# Altium PCB HMC830_Module.PcbDoc
Units mil, origin at the board's own origin, x right, y up, seen from the top; angles counter-clockwise.
Board outline 1670 x 1130 mil, 4 copper layers (Top Layer, GND, PWR, Bottom Layer), stack 23.756 mil thick; 60 components, 30 nets, 196 pads, 220 vias.
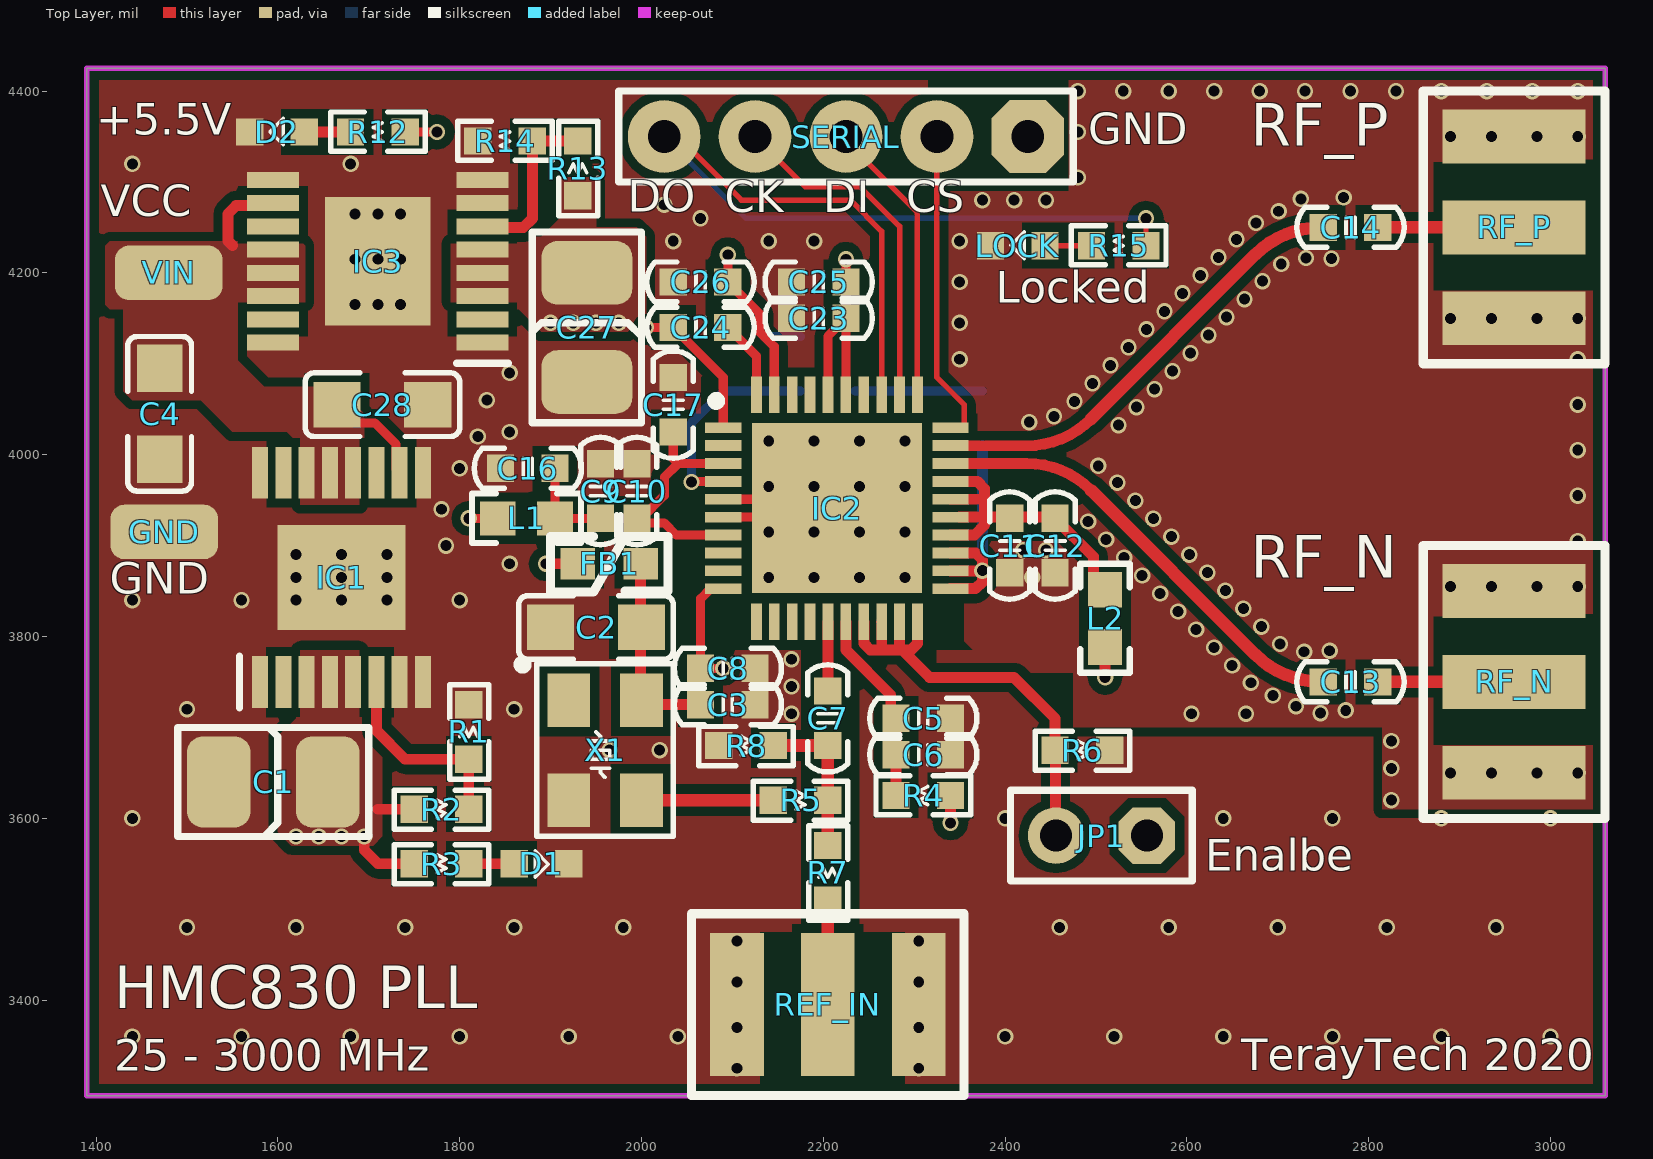
[diagram p0: Top Layer view]
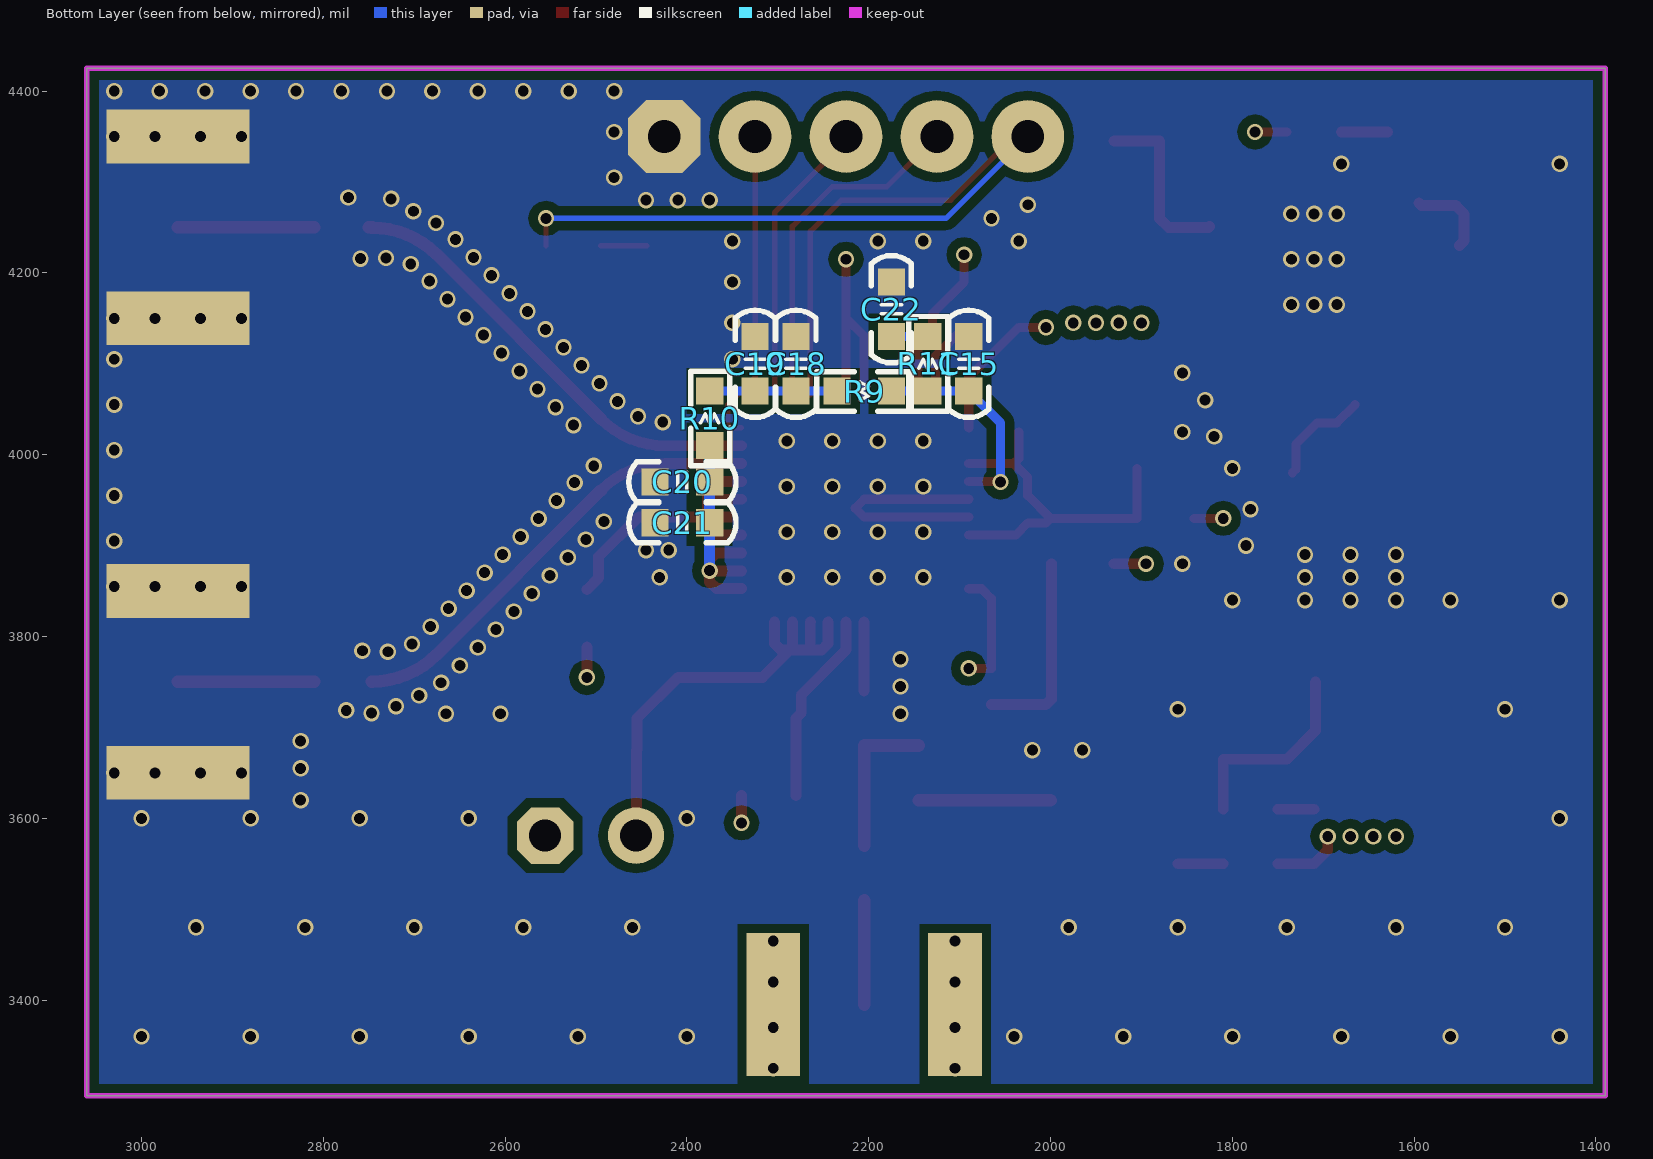
[diagram p1: Bottom Layer view, seen from below]
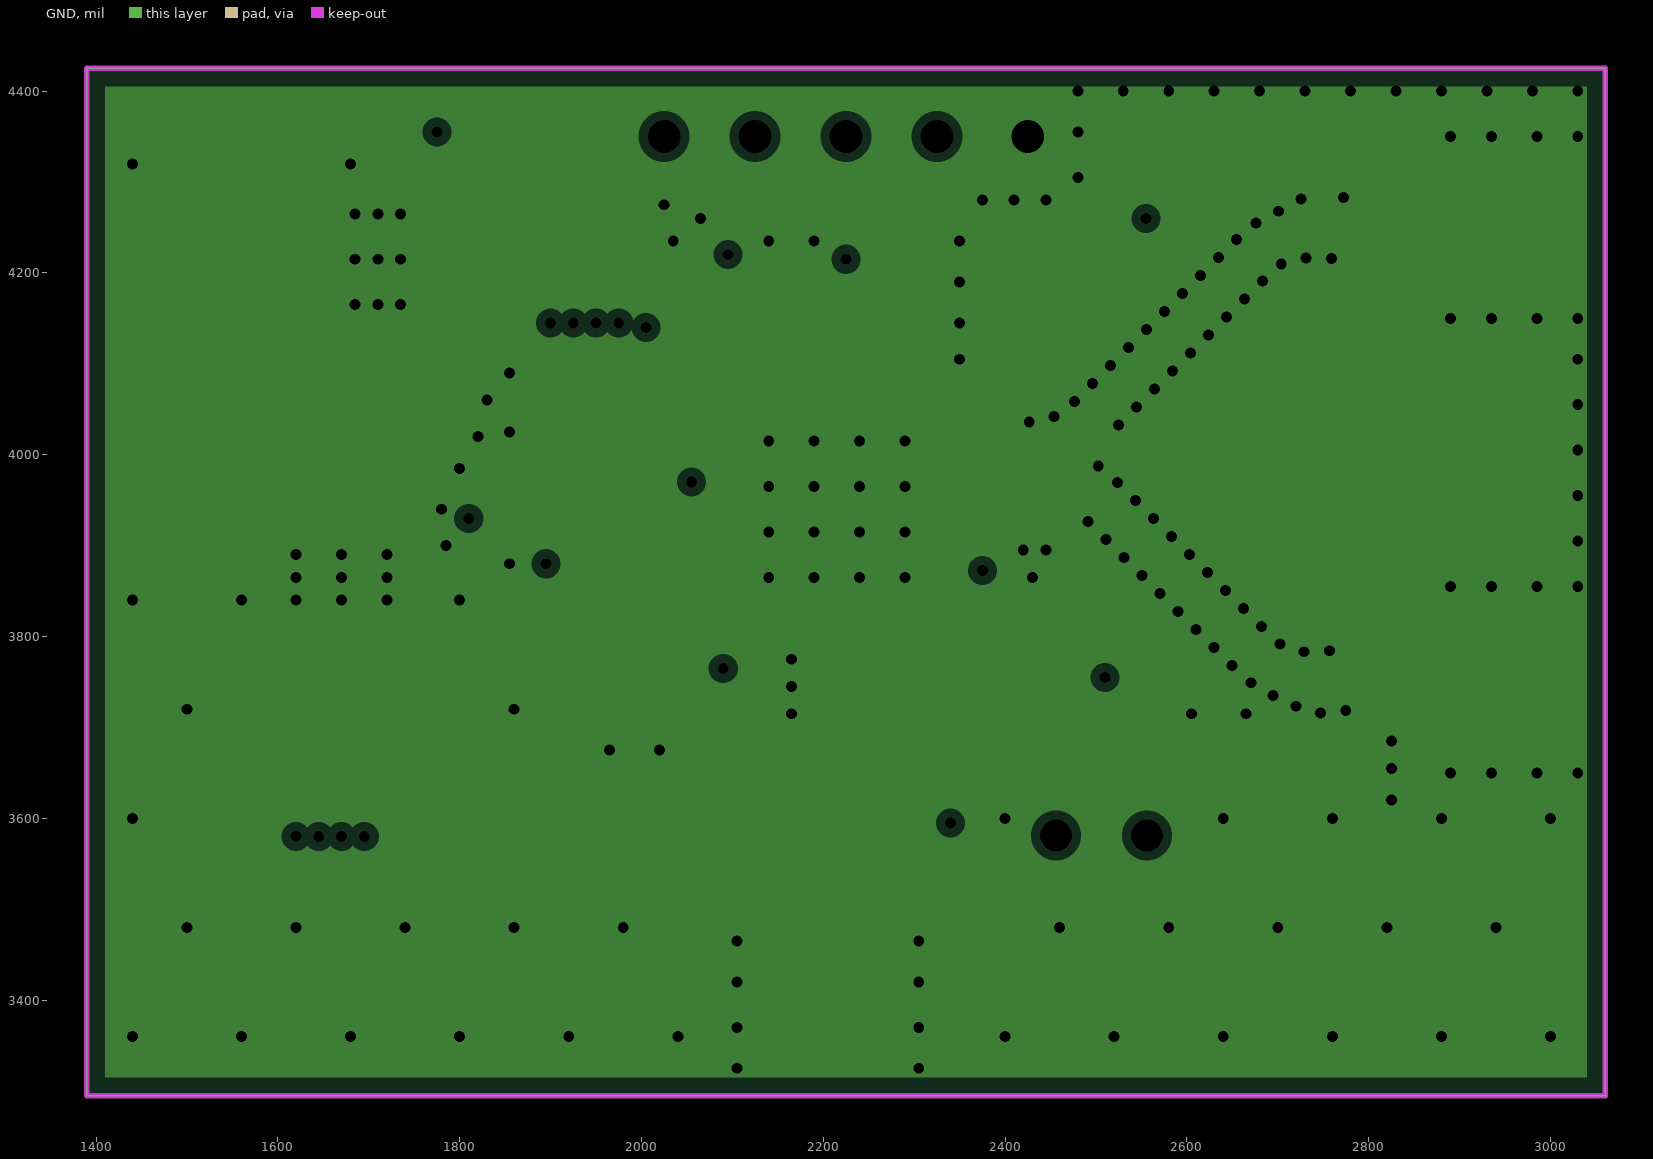
[diagram p2: GND, clearances drawn from the general rule]
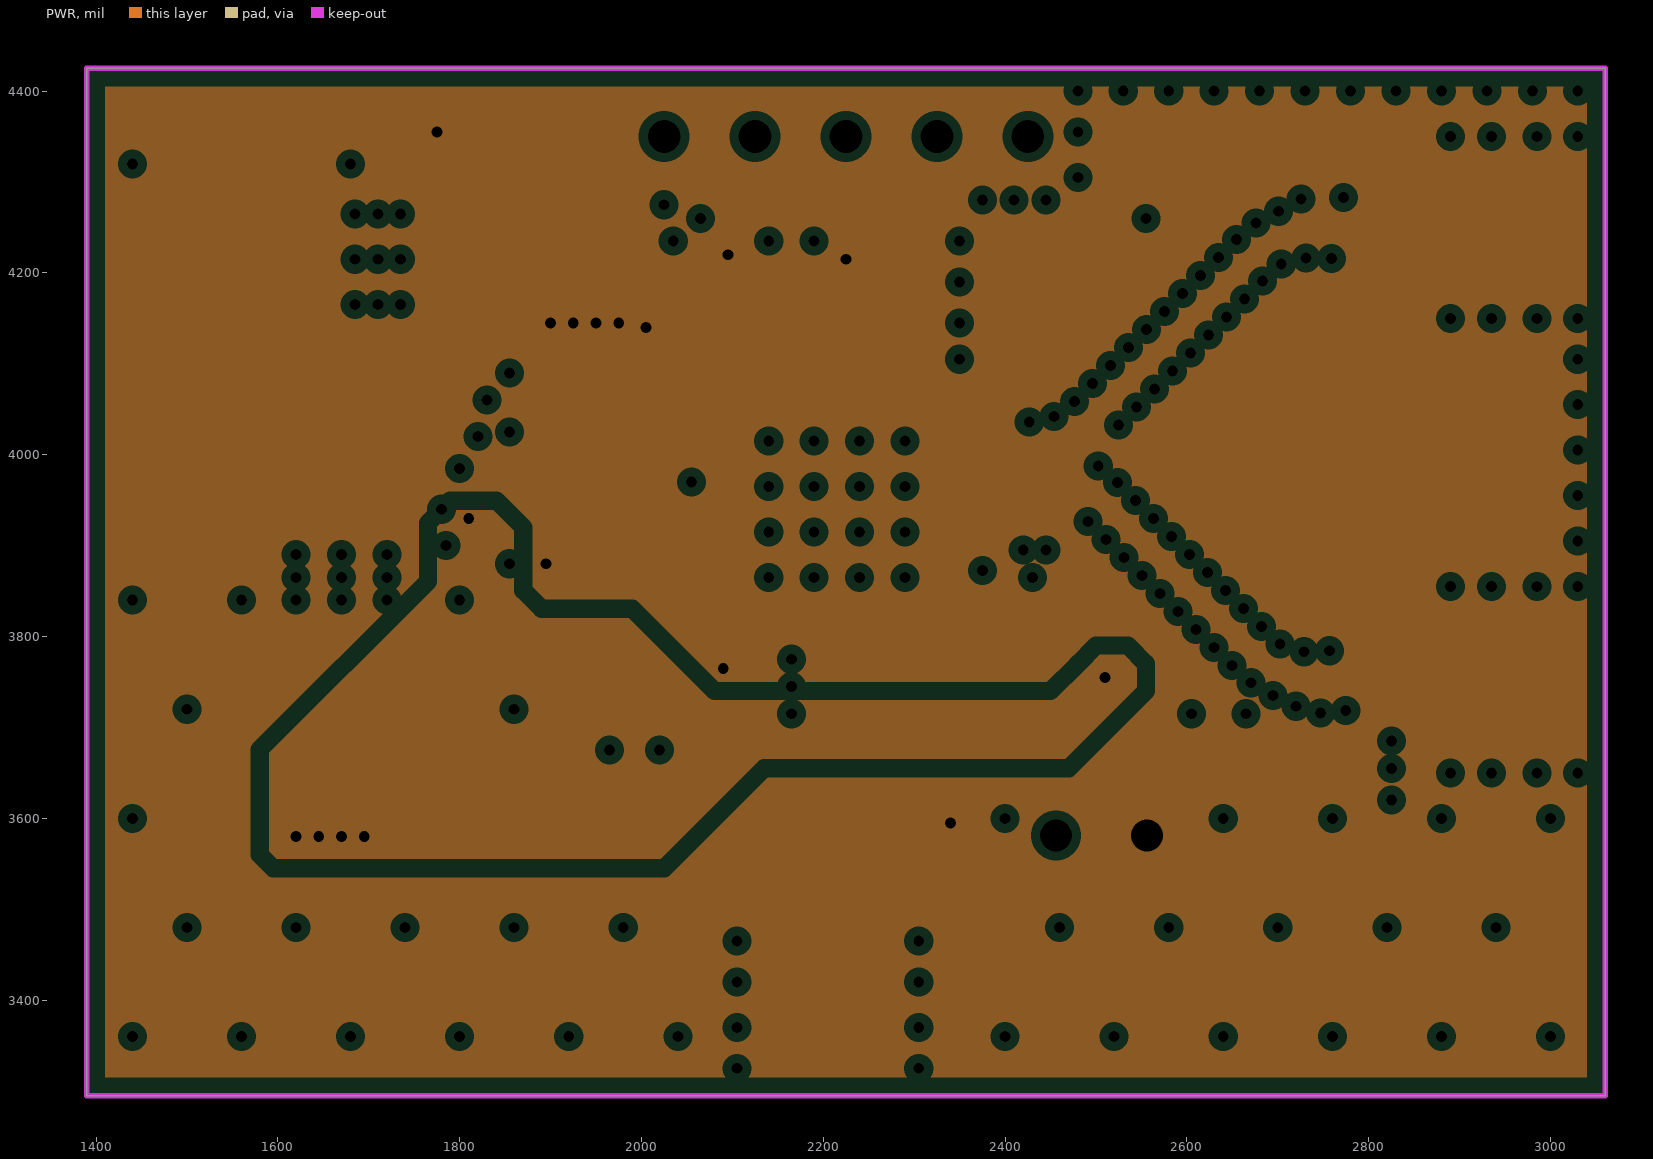
[diagram p3: PWR, clearances drawn from the general rule]
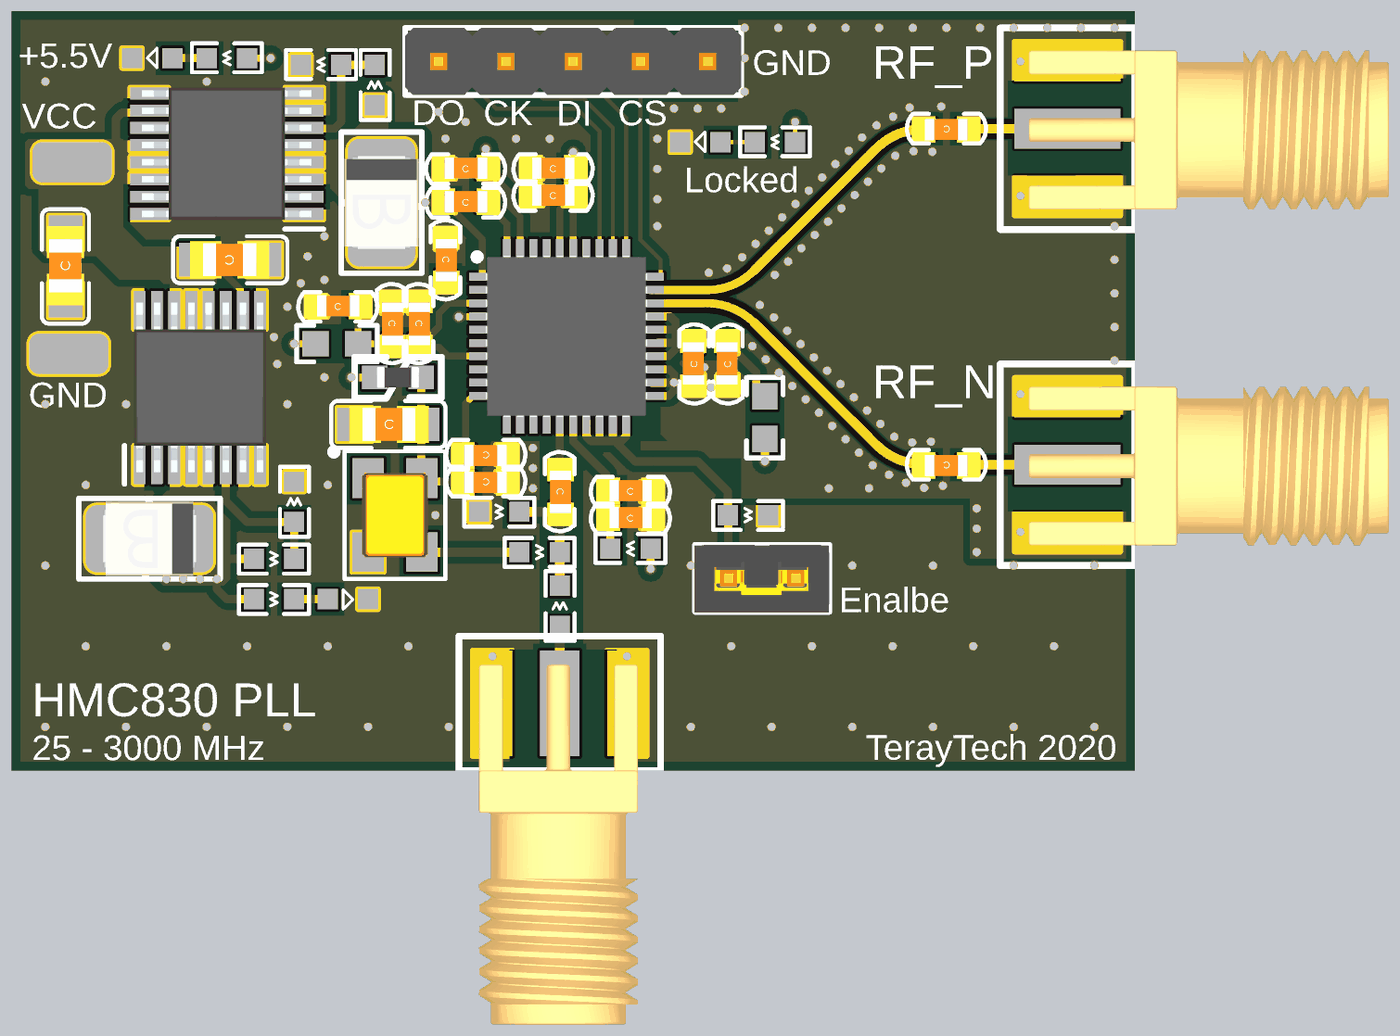
[diagram p4: 3D render of the assembled board from above, using the file's embedded part models]
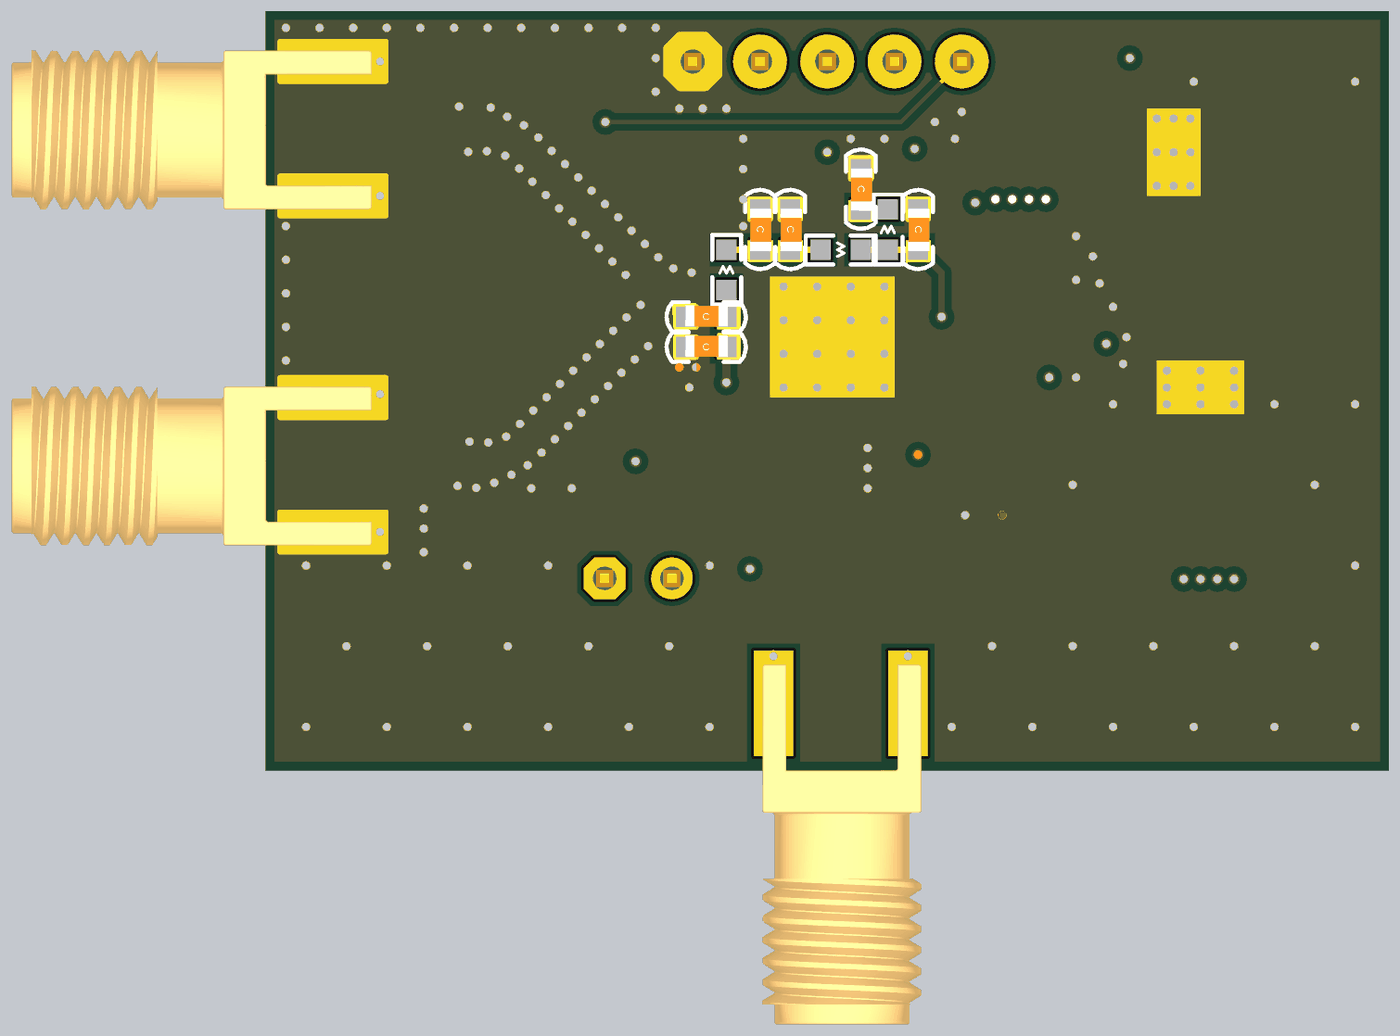
[diagram p5: 3D render of the assembled board from below, using the file's embedded part models]

## Layer stack, top to bottom
Top Solder: solder mask 0.4, Solder Resist, Dk 3.5
Top Layer: signal copper 1.4
Dielectric 2: prepreg 2.8, PP-006, Dk 4.1
GND: plane copper 1.378, net GND
Dielectric 1: dielectric 12.6, FR-4, Dk 4.8
PWR: plane copper 1.378, net (Multiple Nets)
Dielectric 3: prepreg 2.8, PP-006, Dk 4.1
Bottom Layer: signal copper 1.4
Bottom Solder: solder mask 0.4, Solder Resist, Dk 3.5

## Board outline
1390,3295 1390,4425 3060,4425 3060,3295

## Design rules (kind name [scope] priority, off if disabled: settings)
Clearance RF [(InNet('RF_N') AND InNet('RF_P'))] p1: gap=20 ignorepadtopadclearanceinfootprint=TRUE except(0: Arc-Text Arc-Hole Track-Text Track-Hole SMDPad-Text SMDPad-Hole THPad-Text THPad-Hole Via-Text Via-Hole Fill-Text Fill-Hole Poly-Text Poly-Hole Region-Text Region-Hole Text-Text Text-Hole; 6: Arc-Arc Arc-Track Arc-SMDPad Arc-THPad Arc-Via Track-Track Track-SMDPad Track-THPad Track-Via SMDPad-SMDPad SMDPad-THPad SMDPad-Via THPad-THPad THPad-Via Via-Via)
Clearance [All] p2: gap=10 ignorepadtopadclearanceinfootprint=TRUE except(0: Arc-Text Arc-Hole Track-Text Track-Hole SMDPad-Text SMDPad-Hole THPad-Text THPad-Hole Via-Text Via-Hole Fill-Text Fill-Hole Poly-Text Poly-Hole Region-Text Region-Hole Text-Text Text-Hole; 6: Arc-Arc Arc-Track Arc-SMDPad Arc-THPad Arc-Via Track-Track Track-SMDPad Track-THPad Track-Via SMDPad-SMDPad SMDPad-THPad SMDPad-Via THPad-THPad THPad-Via Via-Via)
ComponentClearance [All] p1 off: gap=10 collisioncheckmode=3 verticalgap=10 showdistances=FALSE
PlaneClearance [All] p1: clearance=10
PlaneConnect [All] p1: planeconnectstyle=Direct reliefexpansion=20 reliefentries=4 reliefconductorwidth=10 reliefairgap=10
PolygonConnect [All] p1: connectstyle=Direct reliefconductorwidth=10 reliefentries=4 polygonreliefangle="90 Angle" airgapwidth=10
RoutingVias [All] p1: holewidth=12 width=18 viastyle="Through Hole" minholewidth=12 minwidth=18 maxholewidth=28 maxwidth=50
SolderMaskExpansion [All] p1: expansion=4
Width [All] p1: maxlimit=20 minlimit=6 preferedwidth=10 minimp=50.000000 maximp=50.000000 favimp=50.000000
27 further rules are at their usual default settings.

## Components (designator, comment, footprint, x,y, rotation, side; value= is the part's Value field where it differs from the comment)
C1 "1uF" CAPC3528B 1605,3630 r180 top value=104
C2 "10uF, 0805" 0805_c 1905,3810 r0 top value=104
C3 "0.1uF" 0603_C 2095,3725 r180 top value=104
C4 "10uF" 0805_c 1470,4000 r90 top value=104
C5 "4.7uF" 0603_C 2310,3710 r0 top value=104
C6 "0.47uF" 0603_C 2310,3670 r0 top value=104
C7 "0.1uF" 0603_C 2205,3710 r270 top value=104
C8 "0.47uF" 0603_C 2095,3765 r180 top value=104
C9 "22pF" 0603_C 1955,3960 r270 top value=104
C10 "0.47uF" 0603_C 1995,3960 r270 top value=104
C11 "0.47uF" 0603_C 2405,3900 r90 top value=104
C12 "22pF" 0603_C 2455,3900 r90 top value=104
C13 "100pF" 0603_C 2780,3750 r180 top value=104
C14 "100pF" 0603_C 2780,4250 r180 top value=104
C15 "150pF" 0603_C 2090,4100 r270 bottom value=104
C16 "4.7uF" 0603_C 1875,3985 r0 top value=104
C17 "0.47uF" 0603_C 2035,4055 r270 top value=104
C18 "DNP" 0603_C 2280,4100 r270 bottom value=104
C19 "220pF" 0603_C 2325,4100 r270 bottom value=104
C20 "DNP" 0603_C 2405,3970 r180 bottom value=104
C21 "220pF" 0603_C 2405,3925 r180 bottom value=104
C22 "0.027uF" 0603_C 2175,4160 r270 bottom value=104
C23 "22pF" 0603_C 2195,4150 r0 top value=104
C24 "0.001uF" 0603_C 2065,4140 r0 top value=104
C25 "4.7uF" 0603_C 2195,4190 r0 top value=104
C26 "0.47uF" 0603_C 2065,4190 r0 top value=104
C27 "1uF" CAPC3528B 1950,4150 r270 top value=104
C28 "10uF" 0805_c 1760,4055 r180 top value=104
D1 "LED" 0603_LED 1889,3550 r0 top
D2 "LED" 0603_LED 1600,4355 r180 top
FB1 "100MHz" FB0603 1964.5,3880 r0 top
GND "PAD" PAD 1475,3915 r180 top
IC1 "LT1963AEFE#PBF" SOP65P640X110-17N 1670,3865 r90 top
IC2 "HMC830LP6GE" QFN50P600X600X90-41N-D 2215,3941.1 r0 top
IC3 "LT1963AEFE#PBF" SOP65P640X110-17N 1709.84,4212.8 r180 top
JP1 "header" jumper 2556,3581 r180 top
L1 "47nH" 0603 1873.5,3930 r0 top
L2 "47nH" 0603 2510,3820 r90 top
LOCK "LED" 0603_LED 2415,4230 r180 top
R1 "1K" 0603_R 1810,3695 r270 top
R2 "1K" 0603_R 1780,3610 r180 top
R3 "1K" 0603_R 1780,3550 r180 top
R4 "51" 0603_R 2310,3625 r0 top value=1K
R5 "OR" 0603_R 2175,3620 r180 top value=1K
R6 "10K" 0603_R 2485,3675 r180 top value=1K
R7 "OR" 0603_R 2205,3540 r270 top value=1K
R8 "100" 0603_R 2115,3680 r180 top value=1K
R9 "1K" 0603_R 2205,4070 r0 bottom
R10 "1K" 0603_R 2375,4040 r270 bottom
R11 "820" 0603_R 2135,4100 r270 bottom value=1K
R12 "1K" 0603_R 1710,4355 r0 top
R13 "1K" 0603_R 1930,4315 r270 top
R14 "1K" 0603_R 1850,4345 r0 top
R15 "1K" 0603_R 2525,4230 r0 top
REF_IN "SMA-KHD" SMA-2 2205,3395 r0 top
RF_N "SMA-KHD" SMA-2 2960,3750 r90 top locked
RF_P "SMA-KHD" SMA-2 2960,4250 r90 top
SERIAL "header" header5 2425,4350 r180 top
VIN "PAD" PAD 1480,4200 r180 top
X1 "XTAL TCXO" OSC_KH3225_4P 2005,3610 r270 top

## Footprints (in the part's own frame and the unit in brackets; to place one, negate y for a bottom-side part, rotate by r counter-clockwise, add the part's x,y. Pads: shape width x height; smd on the part's side, far side on the other; paste and mask are expansions set on the pad)
0603 [mm] "0603 from SM-752 data"
  rect 1x0.95 smd: 1(-0.8,0) 2(0.8,0)
  silkscreen extent -1.52,-0.69 1.52,0.69, body extent -0.87,-0.47 0.87,0.47, height 1
0603_C [mil] "Capacitor"
  rect 30x30 smd: 1(-30,0) 2(30,0)
  silkscreen extent -59,-22 59,22, body extent -51,-18 52,21, height 35
0603_LED [mil]
  rect 30x30 smd: 1(-29,0) 2(31,0)
  silkscreen extent -6,-15 9,14, body extent -31,-16 31,16, height 24
0603_R [mil]
  rect 30x30 smd: 1(-30,0) 2(30,0)
  silkscreen extent -52,-21 52,22, body extent -34,-19 34,19, height 39
0805_c [mil]
  rect 52x50 smd: 1(-5,0) 2(95,0)
  silkscreen extent -40,-35 130,35, body extent -13,-28 105,28, height 37
CAPC3528B [mil]
  rrect50% 70x100 smd: 1(-50,-10) 2(70,-10)
  silkscreen extent -95,-70 115,50, body extent -59,-65 79,45, height 75
FB0603 [mil] "1/10W"
  rect 38x35 smd: 1(-34.5,0) 2(34.5,0)
  silkscreen extent -64,-31 64,30, body extent -31,-16 32,16, height 31
header5 [mil]
  oct 80x80 hole 36: 1(0,0)
  round 80 hole 36: 2(100,0) 3(200,0) 4(300,0) 5(400,0)
  silkscreen extent -50,-50 450,50, body extent -50,-50 450,50, height 398
jumper [mil]
  round 1 on Mech3: 0(51,1)
  oct 62x62 hole 35: 1(0,0)
  round 62 hole 35: 2(100,0)
  silkscreen extent -50,-50 150,50, body extent -50,-50 151,51, height 398
OSC_KH3225_4P [mil]
  rect 59.06x47.24 smd: 1(-120,-85) 2(-10,-85) 3(-10,-5) 4(-120,-5)
  silkscreen extent -164,-141 30,30, body extent -128,-94 -2,4, height 31
PAD [mil]
  rrect50% 118.11x60 smd: 1(0,0)
QFN50P600X600X90-41N-D [mm]
  rect 1.016x0.3 smd: 1(-3.175,2.25) 2(-3.175,1.75) 3(-3.175,1.25) 4(-3.175,0.75) 5(-3.175,0.25) 6(-3.175,-0.25) 7(-3.175,-0.75) 8(-3.175,-1.25) 9(-3.175,-1.75) 10(-3.175,-2.25) 21(3.175,-2.25) 22(3.175,-1.75) 23(3.175,-1.25) 24(3.175,-0.75) 25(3.175,-0.25) 26(3.175,0.25) 27(3.175,0.75) 28(3.175,1.25) 29(3.175,1.75) 30(3.175,2.25)
  rect 0.3x1.016 smd: 11(-2.25,-3.175) 12(-1.75,-3.175) 13(-1.25,-3.175) 14(-0.75,-3.175) 15(-0.25,-3.175) 16(0.25,-3.175) 17(0.75,-3.175) 18(1.25,-3.175) 19(1.75,-3.175) 20(2.25,-3.175) 31(2.25,3.175) 32(1.75,3.175) 33(1.25,3.175) 34(0.75,3.175) 35(0.25,3.175) 36(-0.25,3.175) 37(-0.75,3.175) 38(-1.25,3.175) 39(-1.75,3.175) 40(-2.25,3.175)
  rect 4.75x4.75 smd: 41(0,0)
  silkscreen extent -3.5,2.88 -3.25,3.12, body extent -3.05,-3.05 3.05,3.05, height 0.9
SMA-2 [mm]
  rect 1.5x4 all layers, no hole: 1(-2.54,0) 1(2.54,0)
  rect 1.5x4 smd: 2(0,0)
  silkscreen extent -3.81,-2.54 3.81,2.54, body extent -3.05,-12.13 2.95,1.47, height 3.2
SOP65P640X110-17N [mm]
  rect 1.45x0.45 smd: 1(-2.925,2.275) 2(-2.925,1.625) 3(-2.925,0.975) 4(-2.925,0.325) 5(-2.925,-0.325) 6(-2.925,-0.975) 7(-2.925,-1.625) 8(-2.925,-2.275) 9(2.925,-2.275) 10(2.925,-1.625) 11(2.925,-0.975) 12(2.925,-0.325) 13(2.925,0.325) 14(2.925,0.975) 15(2.925,1.625) 16(2.925,2.275)
  rect 2.94x3.58 smd: 17(0,0)
  silkscreen extent -3.65,2.85 -2.2,2.85, body extent -3.2,-2.5 3.2,2.5, height 1.1

## Part data
C1 C27: library part CAP_tan, "Capacitor", LatestRevisionDate=17-Jul-2002, LatestRevisionNote="Re-released for DXP Platform.", PackageReference=RAD-0.3, Published=8-Jun-2000, Publisher="Altium Limited"
C2 C3 C4 C5 C6 C7 C8 C9 C10 C11 C12 C13 C14 C15 C16 C17 C18 C19 C20 C21 C22 C23 C24 C25 C26 C28: library part CAP, "Capacitor", LatestRevisionDate=17-Jul-2002, LatestRevisionNote="Re-released for DXP Platform.", PackageReference=RAD-0.3, Published=8-Jun-2000, Publisher="Altium Limited"
D1 D2 LOCK: "LED 发光二极管"
FB1: library part FB, "磁珠"
IC1 IC3: "Integrated Circuit", Manufacturer_Name="Linear Technology", Mouser Part Number=584-LT1963AEFE#PBF, Arrow Part Number=LT1963AEFE#PBF, Datasheet Link=http://cds.linear.com/docs/en/datasheet/1963aff.pdf, Height=1.1mm, Manufacturer_Part_Number=LT1963AEFE#PBF, Mouser Price/Stock=https://www.mouser.com/Search/Refine.aspx?Keyword=584-LT1963AEFE%23PBF
IC2: "Integrated Circuit", Manufacturer_Name="Analog Devices", Mouser Part Number=584-HMC830LP6GE, RS Part Number=8626458P, Datasheet Link=http://docs-emea.rs-online.com/webdocs/13af/0900766b813af108.pdf, Height=0.9mm, Manufacturer_Part_Number=HMC830LP6GE, Mouser Price/Stock=https://www.mouser.com/Search/Refine.aspx?Keyword=584-HMC830LP6GE, RS Price/Stock=http://uk.rs-online.com/web/p/products/8626458P
JP1: library part "HEADER 2"
L1 L2: library part Inductor
R1 R2 R3 R4 R5 R6 R7 R8 R9 R10 R11 R12 R13 R14 R15: library part RES0, "Resistor", Published=8-Jun-2000, Publisher="Altium Limited", Revision="July-2002: Re-released for DXP Platform."
REF_IN RF_N RF_P: library part SMA_KHD
SERIAL: library part "HEADER 5"
X1: library part xtal_tcxo

## Via types
v1: diameter 18, hole 12, Top Layer to Bottom Layer, tented both sides, 220 vias

## Nets (pads, with @x,y where several pads share a name; then routed paths per layer and width w, separated by ;. In a path a pad name is that pad's centre, name@x,y a point inside that pad or via, vN(x,y) a via of type N, cw(c..) or ccw(c..) an arc to the next point about the centre after c; other vN are vias at no path point)
50MHz_OSC: R5.2 X1.3 | length 145
  Top Layer w14: X1.3 R5.2
CS: IC2.30 SERIAL.2 | length 346
  Top Layer w6: SERIAL.2 2325,4085 2355,4055 2355,4032.59 2352.09,4029.69 IC2.30
GND: C1.2 C2.1 C3.1 C4.1 C5.2 C6.2 C8.1 C9.1 C10.1 C11.1 C12.1 C15.1 C16.1 C17.1 C18.1 C19.1 C20.1 C21.1 C22.1 C23.1 C25.1 C26.1 C27.2 C28.1 D1.2 D2.2 GND.1 IC1.1 IC1.7 IC1.8 IC1.9 IC1.16 IC1.17 IC2.5 IC2.6 IC2.41 IC3.1 IC3.7 IC3.8 IC3.9 IC3.16 IC3.17 LOCK.2 R1.1 R6.1 R8.2 R14.1 REF_IN.1 RF_N.1 RF_P.1 SERIAL.1 X1.2 | length 258.2
  Top Layer w10: IC2.6 2205.16,3931.26 IC2.41 2205.16,3950.94 IC2.5
  other v1: 2105,3325 2305,3325 1440,3360 1560,3360 1680,3360 1800,3360 1920,3360 2040,3360 2400,3360 2520,3360 2640,3360 2760,3360 2880,3360 3000,3360 2105,3370 2305,3370 2105,3420 2305,3420 2105,3465 2305,3465 1500,3480 1620,3480 1740,3480 1860,3480 1980,3480 2460,3480 2580,3480 2700,3480 2820,3480 2940,3480 1440,3600 2400,3600 2640,3600 2760,3600 2880,3600 3000,3600 2825,3620 2890,3650 2935,3650 2985,3650 3030,3650 2825,3655 1965,3675 2020,3675 2825,3685 2165,3715 2605,3715 2665,3715 2746.94,3715.63 2774.77,3718.68 1500,3720 1860,3720 2720,3723.26 2694.62,3735.1 2165,3745 2670.42,3749.17 2649.82,3768.14 2165,3775 2729.03,3783.19 2757.01,3784.37 2630.03,3787.94 2702.37,3791.74 2610.23,3807.74 2681.86,3810.8 2590.43,3827.54 2662.06,3830.6 1440,3840 1560,3840 1620,3840 1670,3840 1720,3840 1800,3840 2570.63,3847.34 2642.26,3850.4 2890,3855 2935,3855 2985,3855 3030,3855 1620,3865 1670,3865 1720,3865 2140,3865 2190,3865 2240,3865 2290,3865 2430,3865 2550.83,3867.14 2622.47,3870.2 1855,3880 2531.03,3886.94 1620,3890 1670,3890 1720,3890 2602.67,3889.99 2420,3895 2445,3895 1785,3900 3030,3905 2511.23,3906.74 2582.87,3909.79 2140,3915 2190,3915 2240,3915 2290,3915 2491.43,3926.54 2563.07,3929.59 1780,3940 2543.27,3949.39 3030,3955 2140,3965 2190,3965 2240,3965 2290,3965 2523.47,3969.19 1800,3985 2502.52,3987.77 3030,4005 2140,4015 2190,4015 2240,4015 2290,4015 1820,4020 1855,4025 2524.81,4032.47 2426.55,4035.81 2453.83,4042.12 2544.61,4052.27 3030,4055 2476.37,4058.72 1830,4060 2564.41,4072.07 2496.17,4078.52 1855,4090 2584.21,4091.86 2515.97,4098.32 2350,4105 3030,4105 2604.01,4111.66 2535.77,4118.12 2623.81,4131.46 2555.57,4137.92 2350,4145 2890,4150 2935,4150 2985,4150 3030,4150 2643.61,4151.26 2575.37,4157.71 1685,4165 1710,4165 1735,4165 2663.41,4171.06 2595.17,4177.51 2350,4190 2683.21,4190.86 2614.97,4197.31 2703.84,4209.79 1685,4215 1710,4215 1735,4215 2731.04,4216.41 2759.03,4215.63 2634.77,4217.11 2035,4235 2140,4235 2190,4235 2350,4235 2654.56,4236.91 2675.99,4254.94 2065,4260 1685,4265 1710,4265 1735,4265 2700.86,4267.8 2025,4275 2375,4280 2410,4280 2445,4280 2725.34,4281.4 2772.41,4282.9 2480,4305 1440,4320 1680,4320 2890,4350 2935,4350 2985,4350 3030,4350 2480,4355 2480,4400 2530,4400 2580,4400 2630,4400 2680,4400 2730,4400 2780,4400 2830,4400 2880,4400 2930,4400 2980,4400 3030,4400
MISO: IC2.33 R15.2 SERIAL.5 | length 1059.3
  Top Layer w6: SERIAL.5 2040,4350 2110,4280 2230,4280 2264.21,4245.79 IC2.33 ; R15.2 v1(2555,4260)
  Bottom Layer w6: SERIAL.5 2115,4260 v1(2555,4260)
MOSI: IC2.31 SERIAL.3 | length 304.4
  Top Layer w6: SERIAL.3@2230,4340 2303.58,4266.42 IC2.31
NetC5_1: C5.1 C6.1 IC2.16 R4.1 | length 213.9
  Top Layer w12: IC2.16 2224.94,3816.01 2224.94,3785.06 2274.27,3735.73 2274.27,3715.73 C5.1 C6.1 R4.1
NetC7_2: C7.2 R5.1 R7.1 R8.1 | length 170
  Top Layer w14: R8.1 C7.2 R5.1 R7.1
NetC9_2: C9.2 C10.2 C16.2 C17.2 IC2.3 IC2.7 L1.2 | length 411.2
  Top Layer w10: C16.2 L1.2 C9.2 C10.2 C10.2@2000,3930 ; C17.2 2035,3995.63 2040.32,3990.32 ; IC2.7 2038.43,3911.57 2025,3925 2005,3925 C10.2@2000,3930 ; IC2.3 2040.32,3990.32 ; C10.2@2000,3930 2025.28,3955.28 2025.28,3975.28 2040.32,3990.32
NetC11_2: C11.2 C12.2 IC2.24 IC2.25 IC2.26 IC2.27 L2.2 | length 368.7
  Top Layer w12: IC2.24 2340.09,3911.67 2366.67,3911.67 2377.5,3922.5 2377.5,3931.26 ; IC2.26 2373.44,3950.94 2377.5,3946.88 ; IC2.27 2340.09,3970.54 2369.46,3970.54 2377.5,3962.5 2377.5,3946.88 ; IC2.25@2350,3931.26 2377.5,3931.26 ; L2.2 2497.3,3864.2 2497.3,3887.7 C12.2 ccw(c2451.96,3926.96) 2451.96,3931.26 2377.5,3931.26 ; 2377.5,3931.26 2377.5,3946.88
NetC13_1: C13.1 RF_N.2 | length 150
  Top Layer w13.8: C13.1 RF_N.2
NetC14_1: C14.1 RF_P.2 | length 150
  Top Layer w13.8: C14.1 RF_P.2
NetC15_2: C15.2 IC2.4 R9.1 R11.2 | length 234.8
  Top Layer w10: v1(2055,3970) 2055.32,3970.32 2089.68,3970.32 IC2.4
  Bottom Layer w10: v1(2055,3970) 2055,4035 C15.2 R11.2 R9.1
NetC18_2: C18.2 C19.2 R9.2 R10.1 | length 140
  Bottom Layer w10: R9.2 C18.2 C19.2 R10.1
NetC22_2: C22.2 R11.1 | length 40
  Bottom Layer w10: R11.1 C22.2
NetC24_2: C24.2 IC2.40 | length 86.9
  Top Layer w10: C24.2 2126.42,4108.58 IC2.40
NetD1_1: D1.1 R3.1 | length 50
  Top Layer w12: R3.1 D1.1
NetD2_1: D2.1 R12.1 | length 51
  Top Layer w12: D2.1 R12.1
NetIC1_6: IC1.6 R1.2 R2.1 | length 222.9
  Top Layer w12: IC1.6 1708.39,3696.61 1740,3665 R1.2 R2.1
NetIC2_17: IC2.17 IC2.18 IC2.19 IC2.20 JP1.2 R6.2 | length 504.6
  Top Layer w12: IC2.17 2244.62,3816.01 2244.62,3792.26 2251.65,3785.23 2265,3785.23 ; IC2.18 2264.31,3816.01 2264.31,3785.92 2265,3785.23 ; IC2.19 2283.8,3816.01 2283.8,3788.25 2283.85,3788.21 ; IC2.20 2303.58,3792.26 2296.55,3785.23 2286.83,3785.23 ; JP1.2 2455.5,3581.5 2455.5,3674.5 R6.2 2455,3710 2410,3755 2317.06,3755 2286.83,3785.23 ; 2265,3785.23 2283.85,3785.23 2283.85,3788.21 ; 2283.85,3788.21 2286.83,3785.23
NetIC3_6: IC3.6 R13.1 R14.2 | length 194.6
  Top Layer w12: IC3.6 1826.18,4250 1870,4250 1880,4260 R14.2 R13.1
NetLOCK_1: LOCK.1 R15.1 | length 51
  Top Layer w6: LOCK.1 R15.1
RF_N: C13.2 IC2.28 | length 497.2
  Top Layer w12: IC2.28@2340,3990.42 2423.58,3990.42 cw(c2423.58,3890.42) 2494.29,3961.13
  Top Layer w13.8: 2494.29,3961.13 2675.71,3779.71 ccw(c2746.42,3850.42) C13.2@2746.42,3750.42
RF_P: C14.2 IC2.29 | length 500.8
  Top Layer w12: IC2.29@2339.99,4009.81 2423.57,4009.81 ccw(c2423.57,4109.81) 2494.28,4039.1
  Top Layer w13.8: 2494.28,4039.1 2675.7,4220.52 cw(c2746.41,4149.81) C14.2@2746.41,4249.81 ; C14.2@2746.42,4250 C14.2
SCLK: IC2.32 SERIAL.4 | length 384.9
  Top Layer w6: SERIAL.4 2180,4295 2240,4295 2283.9,4251.1 IC2.32
VCC: C8.2 C23.2 C24.1 C25.2 C26.2 C27.1 FB1.1 IC2.1 IC2.10 IC2.35 IC2.36 IC2.39 IC3.3 IC3.4 IC3.5 JP1.1 R4.2 R12.2 R13.2 | length 810.1
  Top Layer w10: R12.2 v1(1775,4355) ; v1(2005,4140) C24.1 2090,4085 IC2.1 ; v1(2090,3765) C8.2 2065,3841.61 2075.91,3852.52 IC2.10 ; v1(2095,4220) C26.2 2130,4155 2130,4135 2146.1,4118.9 IC2.39 ; IC2.36 2205.16,4130.16 C23.2@2224.84,4149.84 ; IC2.35 C23.2@2224.84,4149.84 ; v1(2225,4215) C25.2 C23.2 C23.2@2224.84,4149.84
  Top Layer w12: v1(1895,3880) FB1.1 ; v1(2340,3595) R4.2
  other v1: 1900,4145 1925,4145 1950,4145 1975,4145
VCC_5V: C1.1 IC1.3 IC1.4 IC1.5 L1.1 L2.1 R2.2 R3.2 | length 181.7
  Top Layer w10: v1(1810,3930) L1.1
  Top Layer w12: v1(1695,3580) 1695,3565 1710,3550 R3.2 ; 1710,3610 R2.2 ; v1(2510,3755) L2.1
  other v1: 1620,3580 1645,3580 1670,3580
VCC_XTAL: C2.2 C3.2 FB1.2 X1.4 | length 217.5
  Top Layer w12: FB1.2 1999,3731 X1.4 2005,3725 C3.2
VIN: C4.2 C28.2 IC1.10 IC1.12 IC1.13 IC1.14 IC3.10 IC3.12 IC3.13 IC3.14 VIN.1 | length 207.6
  Top Layer w10: C28.2 1685,4035 1706.5,4035 1730.12,4011.38 1730.12,3984.02 IC1.10
  Top Layer w12: 1550,4230 1545,4235 1545,4265 1553.91,4273.91 1591.83,4273.91 IC3.10
VTUNE: C20.2 C21.2 IC2.21 IC2.22 IC2.23 R10.2 | length 273.5
  Top Layer w12: IC2.21 2340.09,3852.61 2367.61,3852.61 2375,3860 v1(2375,3872.38) ; IC2.22 2374.82,3872.2 v1(2375,3872.38) ; IC2.23 2340.09,3891.8 2367.97,3891.8 2375,3884.77 v1(2375,3872.38)
  Bottom Layer w12: v1(2375,3872.38) C21.2 C20.2 R10.2
XREF: C7.1 IC2.15 | length 76.2
  Top Layer w12: C7.1@2205.08,3740.08 C7.1 2205,3802.04 2205.08,3802.12 IC2.15@2205.08,3816.02
pads on no net: IC1.2 IC1.11 IC1.15 IC2.2 IC2.8 IC2.9 IC2.11 IC2.12 IC2.13 IC2.14 IC2.34 IC2.37 IC2.38 IC3.2 IC3.11 IC3.15 JP1.0 R7.2 REF_IN.2 X1.1
copper on no net: | length 115
  Top Layer w14: 2205,3395 2205,3510

## Polygon pours and split planes (outlines as drawn)
GND on Top Layer "g" (solid, pour order 11): 2325,4425 2325,3760 2475,3760 2475,3700 2815,3700 2815,3610 3060,3610 3060,4425
GND on Top Layer "GND_L01_P005" (solid, remove dead copper, pour order 5): 1365,4445 1365,3275 3085,3275 3085,4439.97
no net on Top Layer "NONET_L01_P007" (solid, pour order 7): 2325,4425
VCC_5V on Top Layer "VCC_5V_L01_P004" (solid, pour order 4): 1695,3695 1715,3675 1715,3580 1705,3570 1615,3570 1600,3585 1600,3690 1620,3710 1620,3780 1625,3785 1690,3785 1695,3780
VIN on Top Layer "VIN_L01_P003" (solid, pour order 3): 1430,4165 1430,4070 1440,4060 1525,4060 1525,4163.43 1518.63,4169.79
VIN on Top Layer "VIN_L01_P002" (solid, pour order 2): 1556.14,4167.68 1556.14,4103.86 1585,4075 1665,4075 1695,4045 1695,3950 1690,3945 1625,3945 1620,3950 1620,4015 1610,4025 1550,4025 1515,4060 1515,4170
VIN on Top Layer "VIN_L01_P001" (solid, pour order 1): 1625,4235 1630,4230 1630,4165 1625,4160 1415,4160 1410,4165 1410,4230 1415,4235
VCC on Top Layer "VCC_L01_P000" (solid, pour order 0): 1795,4240 1890,4240 1910,4260 1910,4300 1915,4305 1945,4305 1950,4300 1950,4250 1995,4250 2005,4240 2005,4155 1985,4135 1890,4135 1865,4160 1795,4160 1790,4165 1790,4235
GND on Bottom Layer "GND_L04_P006" (solid, remove dead copper, pour order 6): 1365,4445 1365,3280 1370,3275 3080,3275 3080,4425 3055,4450
GND on GND (split plane): 3039.9,3315.1 1410.1,3315.1 1410.1,4404.9 3039.9,4404.9
VCC_5V on PWR (split plane): 1859.91,3915.82 1859.91,3850.6 1860.26,3847.99 1861.27,3845.55 1862.87,3843.47 1882.87,3823.47 1884.96,3821.86 1887.39,3820.85 1890,3820.51 1985.62,3820.51 2073.26,3732.87 2075.35,3731.26 2076.07,3730.97 2077.79,3730.26 2080.4,3729.91 2450,3729.91 2452.61,3730.26 2455.04,3731.26 2457.13,3732.87 2487.13,3762.87 2504.18,3779.91 2530.82,3779.91 2544.91,3765.82 2544.91,3744.18 2465.82,3665.09 2135,3665.09 2132.39,3664.74 2129.96,3663.74 2127.87,3662.13 2020.82,3555.09 1599.18,3555.09 1590.09,3564.18 1590.09,3671.42 1772.13,3853.47 1773.73,3855.55 1774.74,3857.99 1775.09,3860.6 1775.09,3920.82 1793.57,3939.3 1836.43,3939.3
VCC on PWR (split plane): 3039.9,3315.1 1410.1,3315.1 1410.1,4404.9 3039.9,4404.9

## Keep-outs
Keep-Out Layer:
  lines w6: 1390,3295 1390,4425 1845,4425 3060,4425 3060,3295 1390,3295

## Other copper
Top Layer:
  pour cut-out: 2340,4290 2470,4290 2470,4425 2340,4425
  pour cut-out: 2175,3785 2175,3465 2240,3465 2240,3785
  pour cut-out: 2130,3475 2290,3475 2290,3300 2130,3300
  pour cut-out: 2871.26,3821.67 2871.26,3680.32 3060,3680.32 3060,3825
  pour cut-out: 2871.26,4321.67 2871.26,4180.32 3060,4180.32 3060,4325
  pour cut-out: 2070,4090 2065,4085 2065,3785 2365,3785 2355,3795 2355,4055 2325,4085
PWR (plane layer: these items are gaps in the copper):
  lines w20: 1580,3560 1580,3675.6 1765,3860.6 1765,3925 1789.39,3949.39 1825.61,3949.39 1840.61,3949.39 1870,3920 1870,3850.6 1890,3830.6 1989.8,3830.6 2080.4,3740 2450,3740 2480,3770 2500,3790 2535,3790 2555,3770 2555,3740 2470,3655 2135,3655 2025,3545 1720,3545 1595,3545 1580,3560

## Silkscreen, mask and mechanical layers (free items; w line width, h text height)
Top Overlay:
  text "+5.5V" at 1400,4340.62 h60
  text "GND" at 2491.42,4330.11 h60
  text "RF_P" at 2670,4324.21 h80
  text "DO" at 1985,4255.62 h60
  text "CK" at 2091.42,4255.11 h60
  text "DI" at 2200,4255 h60
  text "CS" at 2291.42,4255.11 h60
  text "VCC" at 1405.04,4250.62 h60
  text "Locked" at 2390,4155.62 h60
  text "RF_N" at 2670,3849.21 h80
  text "GND" at 1415,3835.62 h60
  text "Enalbe" at 2620,3530.62 h60
  text "HMC830 PLL" at 1420,3375.89 h80
  text "25 - 3000 MHz" at 1419.96,3310.67 h60
  text "TerayTech 2020" at 2660,3311.27 h60
Top Solder:
  lines w30: 2340,3990.32 2423.58,3990.32 cw(c2423.58,3890.32) 2494.29,3961.03 2675.71,3779.6 ccw(c2746.42,3850.32) 2746.42,3750.32 ; 2340,4010 2423.58,4010 ccw(c2423.58,4110) 2494.29,4039.29 2675.71,4220.71 cw(c2746.42,4150) 2746.42,4250 ; 2810,3750 2895,3750 ; 2810,4250 2895,4250
Bottom Solder:
  rectangle: 1605,3825 1735,3905
  rectangle: 1670,4150 1750,4280
  rectangle: 2125,3850 2310,4030